# Altium PCB KHKT25.PcbDoc
Units mm, origin at the board's own origin, x right, y up, seen from the top; angles counter-clockwise.
Board outline 47.68 x 30.28 mm, 2 copper layers (Top Layer, Bottom Layer); 53 components, 27 nets, 171 pads, 0 vias.
Unrouted connection lines stored in the file: 110.
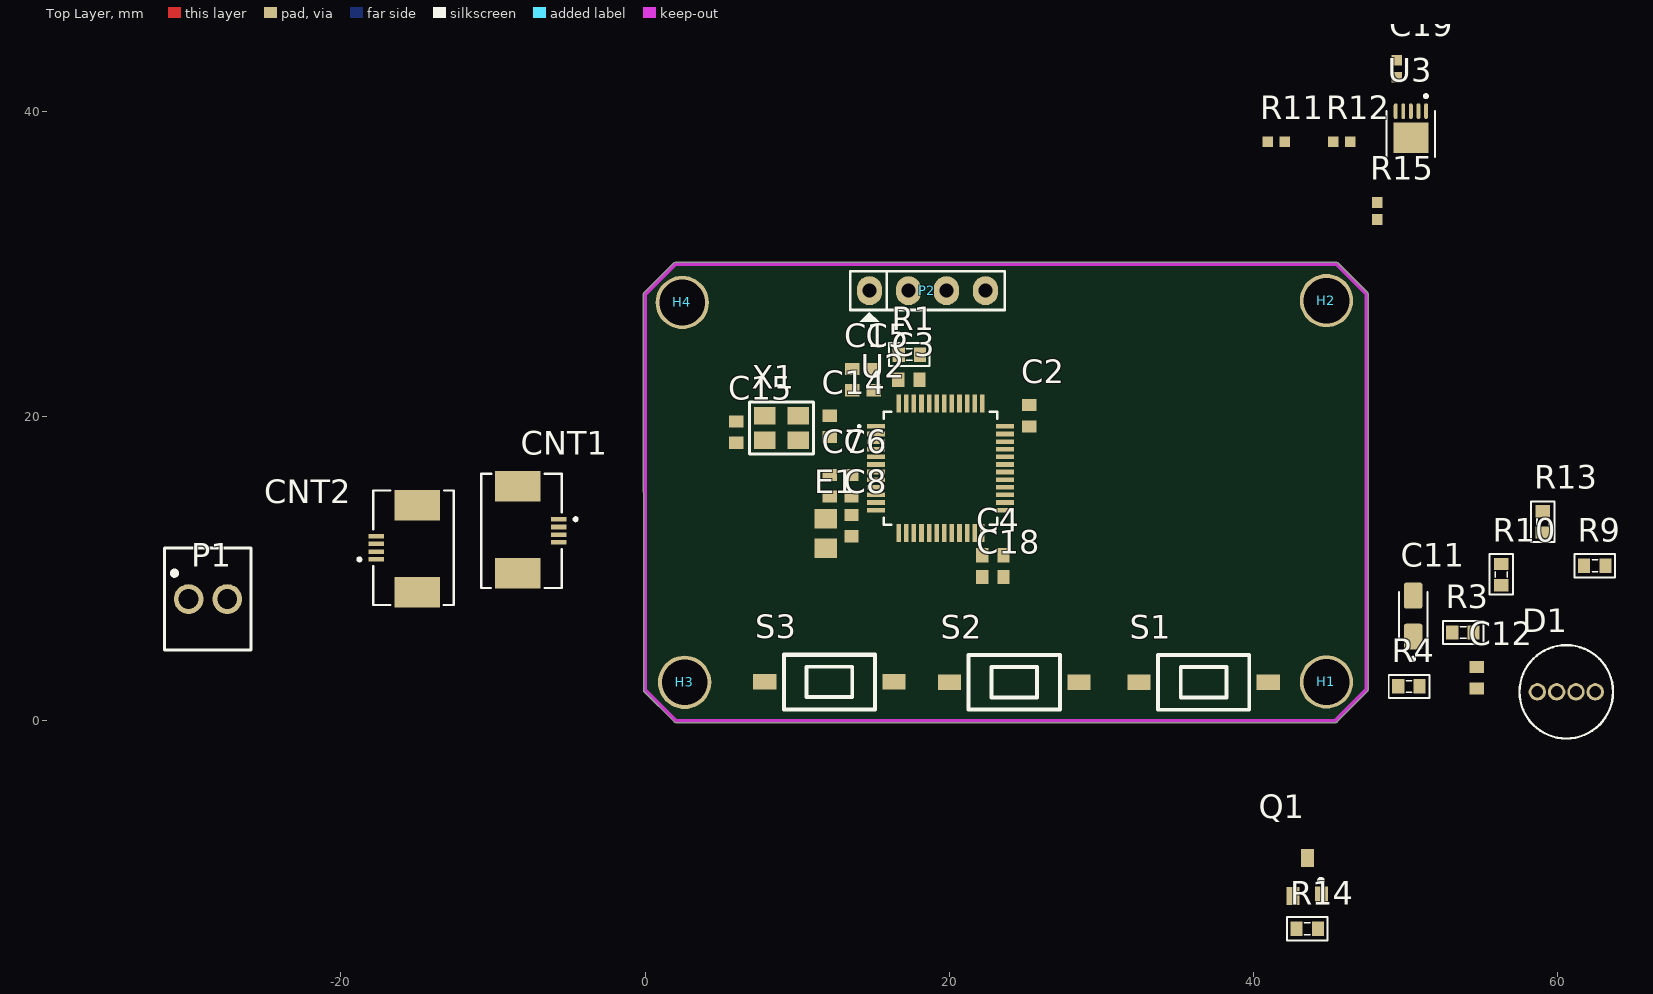
[diagram p0: Top Layer view]
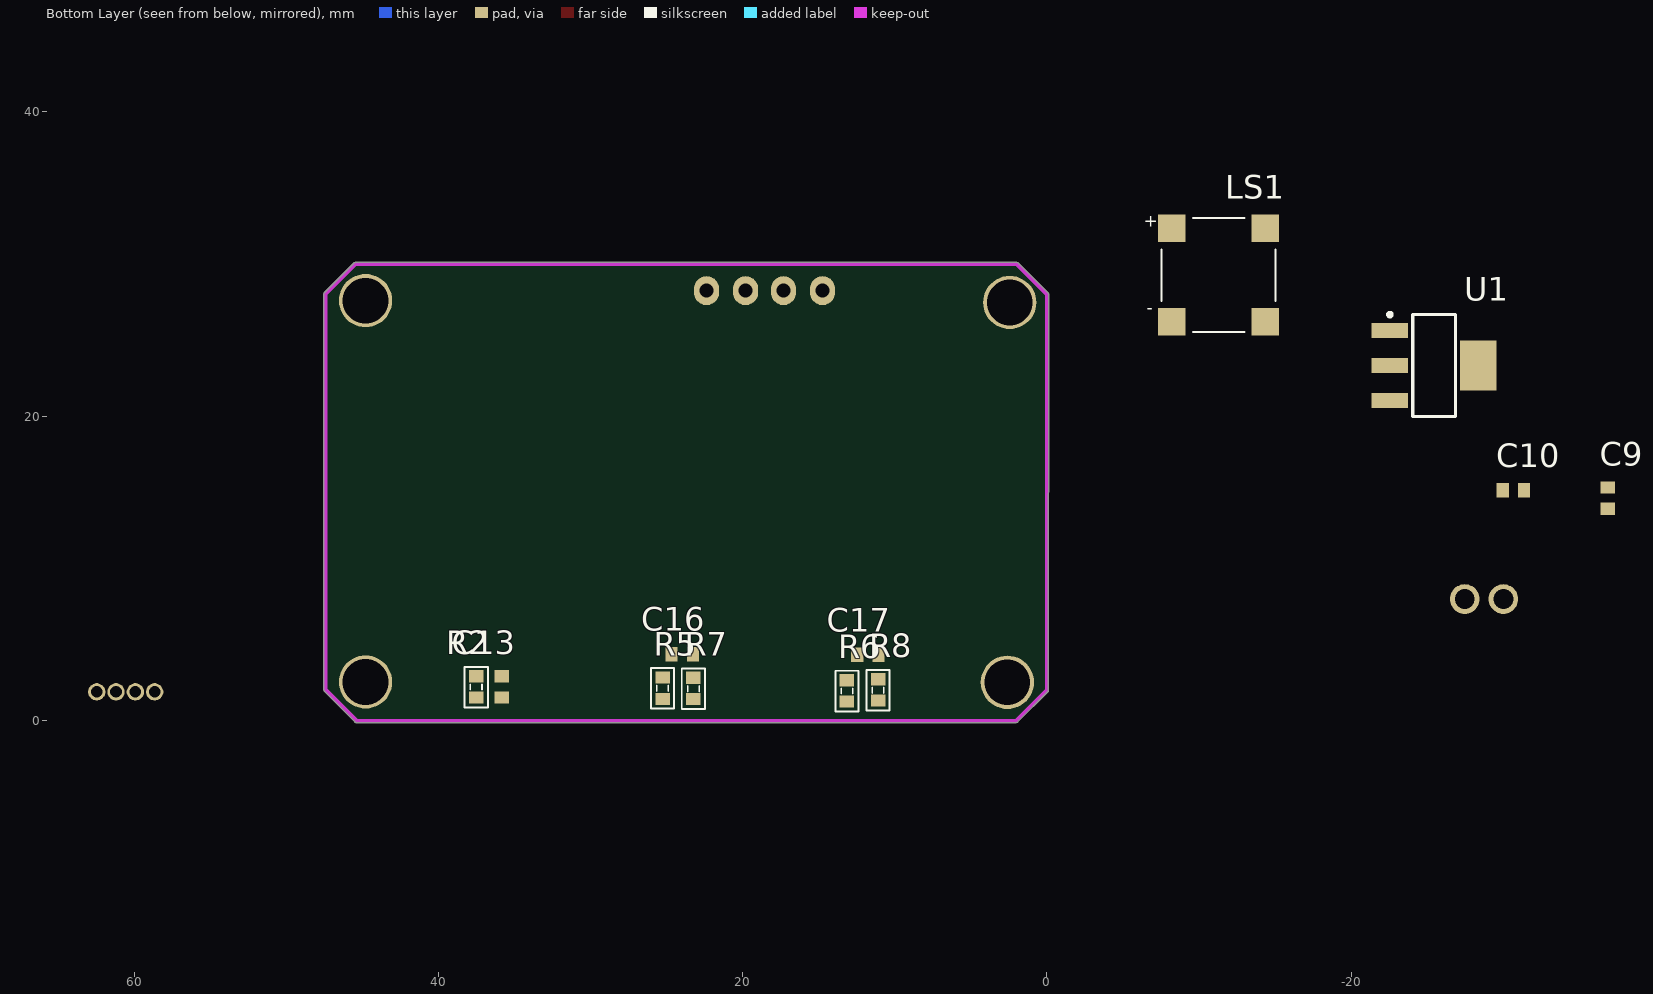
[diagram p1: Bottom Layer view, seen from below]

## Layer stack, top to bottom
Top Solder: solder mask 0.0102, Solder Resist, Dk 3.5
Top Layer: signal copper 0.0356
Dielectric 1: dielectric 0.32, FR-4, Dk 4.8
Bottom Layer: signal copper 0.0356
Bottom Solder: solder mask 0.0102, Solder Resist, Dk 3.5

## Board outline
-0.09,1.91 1.935,-0.115 2.025,-0.152 45.4,-0.152 ccw(c45.4,-0.025) 45.523,-0.057 47.515,1.935 47.552,2.025 47.552,28.025 47.515,28.115 45.54,30.09 45.45,30.127 2,30.127 1.91,30.09 -0.09,28.09 -0.127,28

## Design rules (kind name [scope] priority, off if disabled: settings)
Clearance [All] p1: gap=0.203 ignorepadtopadclearanceinfootprint=TRUE
PolygonConnect [All] p1: connectstyle=Relief reliefconductorwidth=0.254 reliefentries=4 polygonreliefangle="90 Angle" airgapwidth=0.254
RoutingVias [All] p1: holewidth=0.4 width=0.8 viastyle="Through Hole" minholewidth=0.4 minwidth=0.8 maxholewidth=0.4 maxwidth=0.8
SolderMaskExpansion [All] p1: expansion=0.102
Width [All] p1: maxlimit=0.254 minlimit=0.127 preferedwidth=0.203
30 further rules are at their usual default settings.

## Components (designator, comment, footprint, x,y, rotation, side; value= is the part's Value field where it differs from the comment)
C1 "Cap Non-Pol SMD" CAP-SM-0603 13.625,22.4 r270 top value=10uF
C2 "Cap Non-Pol SMD" CAP-SM-0603 25.25,20.025 r270 top value=100nF
C3 "Cap Non-Pol SMD" CAP-SM-0603 17.35,22.4 r180 top value=100nF
C4 "Cap Non-Pol SMD" CAP-SM-0603 22.875,10.85 r180 top value=100nF
C5 "Cap Non-Pol SMD" CAP-SM-0603 15.05,22.4 r270 top value=100nF
C6 "Cap Non-Pol SMD" CAP-SM-0603 13.575,15.425 r270 top value=10nF
C7 "Cap Non-Pol SMD" CAP-SM-0603 12.15,15.425 r270 top value=1uF
C8 "Cap Non-Pol SMD" CAP-SM-0603 13.575,12.8 r270 top value=1uF
C9 "Cap Non-Pol SMD" CAP-SM-0603 -36.886,14.608 r90 bottom value=100nF
C10 "Cap Non-Pol SMD" CAP-SM-0603 -30.663,15.116 r180 bottom value=1uF
C11 "1uF" CAP_TAN_3216 50.5,6.85 r90 top
C12 "Cap Non-Pol SMD" CAP-SM-0603 54.682,2.804 r90 top value=100uF
C13 "Cap Non-Pol SMD" CAP-SM-0603 35.85,2.2 r90 bottom value=100nF
C14 "Cap Non-Pol SMD" CAP-SM-0603 12.15,19.325 r90 top value=15pF
C15 "Cap Non-Pol SMD" CAP-SM-0603 6,18.95 r270 top value=15pF
C16 "Cap Non-Pol SMD" CAP-SM-0603 23.975,4.35 r180 bottom value=2.2uF
C17 "Cap Non-Pol SMD" CAP-SM-0603 11.775,4.3 r180 bottom value=2.2uF
C18 "Cap Non-Pol SMD" CAP-SM-0603 22.875,9.425 r180 top value=4.7uF
C19 "Cap Non-Pol SMD" CAP_0402 49.425,42.85 r90 top value=10nF
CNT1 "HF4X1" FPC_FFC_4P -7.025,12.525 r270 top
CNT2 "HF4X1" FPC_FFC_4P -16.325,11.285 r90 top
D1 "RGB_LED" RGB_LED 60.57,1.875 r0 top
E1 "120R" FB_MI0805K400R-10 11.875,12.275 r270 top
H1 "Hole" "LO KHOAN 3MM" 44.8,2.525 r0 top
H2 "Hole" "LO KHOAN 3MM" 44.8,27.6 r0 top
H3 "Hole" "LO KHOAN 3MM" 2.6,2.5 r0 top
H4 "Hole" "LO KHOAN 3MM" 2.45,27.475 r0 top
LS1 "BZ-7525" XDCCMT-7525 -11.284,29.275 r180 bottom
P1 "Header 2" DOMINO_2P -28.74,7.975 r0 top
P2 "Header 4H" JP4 17.295,28.25 r0 top
Q1 "C1815" SOT23B 43.548,-10.295 r0 top
R1 "RESISTOR SMD" RES-SM-0603 18.061,24.05 r180 top value=10K
R2 "RESISTOR SMD" RES-SM-0603 37.525,2.886 r270 bottom value=10K
R3 "RESISTOR SMD" RES-SM-0603 53.089,5.775 r0 top value=1K
R4 "RESISTOR SMD" RES-SM-0603 49.532,2.229 r0 top value=1K
R5 "RESISTOR SMD" RES-SM-0603 25.275,2.8 r270 bottom value=10K
R6 "RESISTOR SMD" RES-SM-0603 13.15,2.625 r270 bottom value=10K
R7 "RESISTOR SMD" RES-SM-0603 23.25,2.786 r270 bottom value=10K
R8 "RESISTOR SMD" RES-SM-0603 11.1,2.686 r270 bottom value=10K
R9 "RESISTOR SMD" RES-SM-0603 61.753,10.166 r0 top value=30
R10 "RESISTOR SMD" RES-SM-0603 56.292,8.896 r90 top value=30
R11 "RESISTOR SMD" RES_0402 41.496,38.041 r0 top value=1K
R12 "RESISTOR SMD" RES_0402 45.814,38.041 r0 top value=1K
R13 "RESISTOR SMD" RES-SM-0603 59.025,12.364 r90 top value=30
R14 "RESISTOR SMD" RES-SM-0603 42.85,-13.7 r0 top value=1K5
R15 "RESISTOR SMD" RES_0402 48.15,33.489 r90 top value=1K
S1 "Tact SW - 2Pin" SW_SMD 36.725,2.5 r180 top
S2 "Tact SW - 2Pin" SW_SMD 24.275,2.514 r180 top
S3 "Tact SW - 2Pin" SW_SMD 12.125,2.525 r180 top
U1 "AMS1117-3.3" SOT223-4N -25.45,23.325 r180 bottom
U2 "STM32U575CIT6" LQFP48-7x7mm_STM 19.425,16.575 r0 top
U3 "MLX90632SLD-DCB-000-SP" MLX90632 50.35,39.11 r180 top
X1 "48MHz" TSX-3225 10.075,18.425 r180 top

## Footprints (in the part's own frame and the unit in brackets; to place one, negate y for a bottom-side part, rotate by r counter-clockwise, add the part's x,y. Pads: shape width x height; smd on the part's side, far side on the other; paste and mask are expansions set on the pad)
CAP-SM-0603 [mm] "SMD Ceramic Capacitor Size 0603"
  rect 0.8x0.95 smd: 1(-0.7,0) 2(0.7,0)
  body extent -0.85,-0.45 0.85,0.45, height 0.6
CAP_0402 [mm] "SMD Ceramic Capacitor Size 0603"
  rect 0.7x0.7 smd: 1(-0.559,0) 2(0.559,0)
  body extent -0.5,-0.25 0.5,0.25, height 0.55
CAP_TAN_3216 [mm]
  rrect25% 1.71x1.23 smd: 1(-1.35,0) 2(1.35,0)
  silkscreen extent -2.9,-0.93 1.6,0.93, body extent -1.6,-0.8 1.6,0.8, height 1.8
DOMINO_2P [mm] "2.54mm"
  round 1.95 hole 1.3: 1(-1.27,0) 2(1.27,0)
  silkscreen extent -2.84,-3.35 2.84,3.35, body extent -2.74,-3.25 2.74,3.25, height 8.59
FB_MI0805K400R-10 [mm]
  rect 1.285x1.47 smd: 1(-0.973,0) 2(0.973,0)
  body extent -1,-0.63 1,0.63, height 1.1
FPC_FFC_4P [mm]
  rect 0.3x1 smd: 1(-0.687,1.352) 2(-0.186,1.352) 3(0.313,1.352) 4(0.814,1.352)
  rect 2x3 smd: P1(-2.857,-1.352) P2(2.858,-1.352)
  silkscreen extent -3.7,-3.74 3.82,2.56
JP4 [mil] "Jumper 4"
  oval 65x75 hole 36: 1(-100,0) 2(1,0) 3(99,0) 4(200,0)
  silkscreen extent -150,-81 250,50, body extent -148,-48 248,50, height 323
"LO KHOAN 3MM" [mil]
  round 138 hole 118.1: 1(0,0)
LQFP48-7x7mm_STM [mm]
  rect 1.194x0.305 smd paste+0 mask+0: 1(-4.25,2.75) 2(-4.25,2.25) 3(-4.25,1.75) 4(-4.25,1.25) 5(-4.25,0.75) 6(-4.25,0.25) 7(-4.25,-0.25) 8(-4.25,-0.75) 9(-4.25,-1.25) 10(-4.25,-1.75) 11(-4.25,-2.25) 12(-4.25,-2.75) 25(4.25,-2.75) 26(4.25,-2.25) 27(4.25,-1.75) 28(4.25,-1.25) 29(4.25,-0.75) 30(4.25,-0.25) 31(4.25,0.25) 32(4.25,0.75) 33(4.25,1.25) 34(4.25,1.75) 35(4.25,2.25) 36(4.25,2.75)
  rect 0.305x1.194 smd paste+0 mask+0: 13(-2.75,-4.25) 14(-2.25,-4.25) 15(-1.75,-4.25) 16(-1.25,-4.25) 17(-0.75,-4.25) 18(-0.25,-4.25) 19(0.25,-4.25) 20(0.75,-4.25) 21(1.25,-4.25) 22(1.75,-4.25) 23(2.25,-4.25) 24(2.75,-4.25) 37(2.75,4.25) 38(2.25,4.25) 39(1.75,4.25) 40(1.25,4.25) 41(0.75,4.25) 42(0.25,4.25) 43(-0.25,4.25) 44(-0.75,4.25) 45(-1.25,4.25) 46(-1.75,4.25) 47(-2.25,4.25) 48(-2.75,4.25)
  silkscreen extent -5.43,-3.72 3.72,3.72, body extent -4.5,-4.5 4.5,4.5, height 1.6
MLX90632 [mil] "IC_MLX90632SLD-DCB-000-SP"
  rrect80% 9.84x40 smd: 1(-39.5,-37.13) 2(-19.69,-37.12) 3(0,-37.12) 4(19.69,-37.12) 5(39.37,-37.12)
  rect 90.55x78.74 smd paste+0: 6(0,31.89)
  silkscreen extent -63,-80 63,81, body extent -59,-37 59,81, height 39
RES-SM-0603 [mm]
  rect 0.8x0.95 smd: 1(-0.014,0) 2(1.386,0)
  silkscreen extent -0.64,-0.76 2.03,0.76, body extent -0.11,-0.4 1.49,0.4, height 0.3
RES_0402 [mm]
  rect 0.7x0.7 smd: 1(-0.559,0) 2(0.559,0)
  body extent -0.5,-0.25 0.5,0.25, height 0.4
RGB_LED [mil] "5mm"
  round 45 hole 30 paste-99999 mask+2: 1(-75,0) 2(-25,0) 3(25,0) 4(75,0)
  silkscreen extent -121,-121 121,121, body extent -100,-116 116,116, height 402
SOT23B [mm] "SOT 23B"
  rect 0.85x1.2 smd: 1(0.94,-1.245) 2(0,1.25) 3(-0.95,-1.25)
  silkscreen extent 0.77,-0.38 1.02,-0.13, body extent -1.5,-1.3 1.5,1.2, height 1.06
SOT223-4N [mm] "SOT223, 4-Leads, Body 6.5x3.5mm, Pitch 2.3mm, Lead Span 7mm, IPC Medium Density"
  rect 2.4x1 smd: 1(-2.9,2.3) 2(-2.9,0) 3(-2.9,-2.3)
  rect 2.4x3.3 smd: 4(2.9,0)
  silkscreen extent -3.03,-3.35 1.4,3.47, body extent -3.39,-3.27 3.5,3.23, height 1.72
SW_SMD [mil] "3*6*5mm"
  rect 60x40 smd paste+0 mask+4: 1(167.32,0) 2(-167.32,0)
  silkscreen extent -134,-83 118,71
TSX-3225 [mm]
  rect 1.4x1.15 smd: 1(0,-1.6) 2(2.2,-1.6) 3(2.2,0) 4(0,0)
  silkscreen extent -1,-2.5 3.2,0.9
XDCCMT-7525 [mm]
  rect 1.8x1.8 smd: 1(3.075,3.075) 2(3.075,-3.075) N(-3.075,-3.075) P(-3.075,3.075)
  silkscreen extent -3.75,-3.75 3.75,3.75, body extent -3.75,-3.75 3.75,3.75, height 2.5

## Part data
C1 C2 C3 C4 C5 C6 C7 C8 C9 C10 C12 C13 C14 C15 C16 C17 C18 C19: "Capacitor"
C11: library part Cap_Tantalum, "3216", Package="SMD-2 KEMET", Check_prices=https://www.snapeda.com/parts/T491A475K025AT/KEMET/view-part/?ref=eda, MF=KEMET, MP=T491A475K025AT, SnapEDA_Link=https://www.snapeda.com/parts/T491A475K025AT/KEMET/view-part/?ref=snap
D1: "Description", Manufacturer_Name=Kingbright, Manufacturer_Part_Number=L-154A4SURKQBDZGW, Copyright="Copyright (C) 2025 Ultra Librarian. All rights reserved.", RefDes=RefDes, Type="LED Lighting"
E1: library part MI0805K400R-10, "EMI Ferrite Chip Bead, 0805, 1500MA, 40 Ohms @100MHz, DCR Max 0.050Ohm", Package="0805 Laird", Check_prices=https://www.snapeda.com/parts/MI0805K400R-10/Laird-Signal+Integrity+Products/view-part/?ref=eda, MF="Laird-Signal Integrity Products", MP=MI0805K400R-10, SnapEDA_Link=https://www.snapeda.com/parts/MI0805K400R-10/Laird-Signal+Integrity+Products/view-part/?ref=snap
H1 H2 H3 H4: "Hole 3mm"
LS1: "7.5 mm, 3.6 Vo-p, 80 dB, Surface Mount (SMT), Magnetic Audio Transducer Buzzer", Package="CUI Devices", Check_prices=https://www.snapeda.com/parts/CMT-7525-80-SMT-TR/Same+Sky/view-part/?ref=eda, MF="Same Sky", MP=CMT-7525-80-SMT-TR, SnapEDA_Link=https://www.snapeda.com/parts/CMT-7525-80-SMT-TR/Same+Sky/view-part/?ref=snap
P1: "Header, 2-Pin", LatestRevisionDate=17-Jul-2002, LatestRevisionNote="Re-released for DXP Platform.", Publisher="Altium Limited"
P2: "Header, 4-Pin, Right Angle", LatestRevisionDate=17-Jul-2002, LatestRevisionNote="Re-released for DXP Platform.", Publisher="Altium Limited"
Q1: "NPN Bipolar Transistor"
R1 R2 R3 R4 R5 R6 R7 R8 R9 R10 R11 R12 R13 R14 R15: "Resistor"
S1 S2 S3: "Switch button 2 pin"
U1: "Sot223/Pkg 1-Amp 3.3-Volt Low Drop Out Voltage Regulatator", Package="SOT-223 Seeed Technology", Check_prices=https://www.snapeda.com/parts/AMS1117-3.3/Advanced+Monolithic+Systems/view-part/?ref=eda, MF="Advanced Monolithic Systems", MP=AMS1117-3.3, SnapEDA_Link=https://www.snapeda.com/parts/AMS1117-3.3/Advanced+Monolithic+Systems/view-part/?ref=snap
U2: "Ultra-low-power with FPU Arm Cortex-M33 MCU with TrustZone, 160 MHz with 2 Mbytes of Flash memory", Manufacturer_Name=STMicroelectronics, Copyright="Copyright (C) 2025 Ultra Librarian. All rights reserved.", Manufacturer_Part_Number=STM32U575CIT6, RefDes=RefDes, Type=Type
U3: library part MLX90632SLD-BCB-000-SP, Package=None, Availability=Unavailable, MP=MLX90632SLD-BCB-000-SP, Price=None
X1: library part TSX-3225, "Crystal", Package="SMD-4 Epson", Availability=Unavailable, MF=EPSON, MP=TSX-3225, Price=None, SnapEDA_Link=https://www.snapeda.com/parts/TSX-3225/EPSON/view-part/557780/?ref=snap

## Nets (pads, with @x,y where several pads share a name; then routed paths per layer and width w, separated by ;. In a path a pad name is that pad's centre, name@x,y a point inside that pad or via, vN(x,y) a via of type N, cw(c..) or ccw(c..) an arc to the next point about the centre after c; other vN are vias at no path point)
+3V3: C1.2 C2.2 C3.2 C4.2 C5.2 C6.2 C7.2 C11.1 C12.2 C19.2 CNT1.3 CNT2.2 E1.1 LS1.P P2.1 R2.1 R3.1 R4.1 R5.1 R6.1 R11.1 R12.1 U1.2 U1.4 U2.1 U2.9 U2.24 U2.36 U2.48 U3.2
BUZZER: R14.1 U2.30
GND: C1.1 C2.1 C3.1 C4.1 C5.1 C6.1 C7.1 C8.1 C9.1 C10.1 C11.2 C12.1 C13.2 C14.1 C15.1 C16.1 C17.1 C18.1 C19.1 CNT1.4 CNT2.1 D1.2 P1.2 P2.4 Q1.1 R1.2 R15.2 S1.2 S2.2 S3.2 U1.1 U2.8 U2.23 U2.35 U2.47 U3.3 U3.6 X1.2 X1.4
LED_B: R13.1 U2.25
LED_G: R10.1 U2.26
LED_R: R9.1 U2.27
NetC8_2: C8.2 E1.2
NetC14_2: C14.2 U2.5 X1.1
NetC15_2: C15.2 U2.6 X1.3
NetC18_2: C18.2 U2.22
NetD1_1: D1.1 R9.2
NetD1_3: D1.3 R10.2
NetD1_4: D1.4 R13.2
NetLS1_N: LS1.N Q1.2
NetQ1_3: Q1.3 R14.2
NetR1_1: R1.1 U2.44
NetR5_2: R5.2 R7.2 S2.1
NetR6_2: R6.2 R8.2 S3.1
NetR15_1: R15.1 U3.5
NRST: C13.1 R2.2 S1.1 U2.7
SCL: CNT1.1 CNT2.4 R4.2 R11.2 U2.42 U3.4
SDA: CNT1.2 CNT2.3 R3.2 R12.2 U2.39 U3.1
SWCLK: P2.3 U2.37
SWDIO: P2.2 U2.34
VCC: C9.2 C10.2 P1.1 U1.3
WKUP1: C16.2 R7.1 U2.10
WKUP3: C17.2 R8.1 U2.11
pads on no net: CNT1.P1 CNT1.P2 CNT2.P1 CNT2.P2 H1.1 H2.1 H3.1 H4.1 LS1.1 LS1.2 U2.2 U2.3 U2.4 U2.12 U2.13 U2.14 U2.15 U2.16 U2.17 U2.18 U2.19 U2.20 U2.21 U2.28 U2.29 U2.31 U2.32 U2.33 U2.38 U2.40 U2.41 U2.43 U2.45 U2.46

## Keep-outs
Keep-Out Layer:
  lines w0.254: 34.537,-0.025 12.862,-0.025 2.025,-0.025 0,2 ; 34.575,-0.025 45.4,-0.025 ; 45.375,-0.025 47.425,2.025 47.425,28.025 45.45,30 2,30 0,28 0,2 ; 0,2 0,2 ; 0,2 0,2 ; 0,2 0,2

## Text inside footprints (layer, text, board x,y; h text height)
LS1: Mechanical 13 "+" at -6.369,32.45 h0.81; Mechanical 13 "-" at -6.569,26.735 h0.81; Bottom Overlay "-" at -6.569,26.735 h0.81; Bottom Overlay "+" at -6.369,32.45 h0.81